# EAGLE board drs (EAGLE 7.6.0)
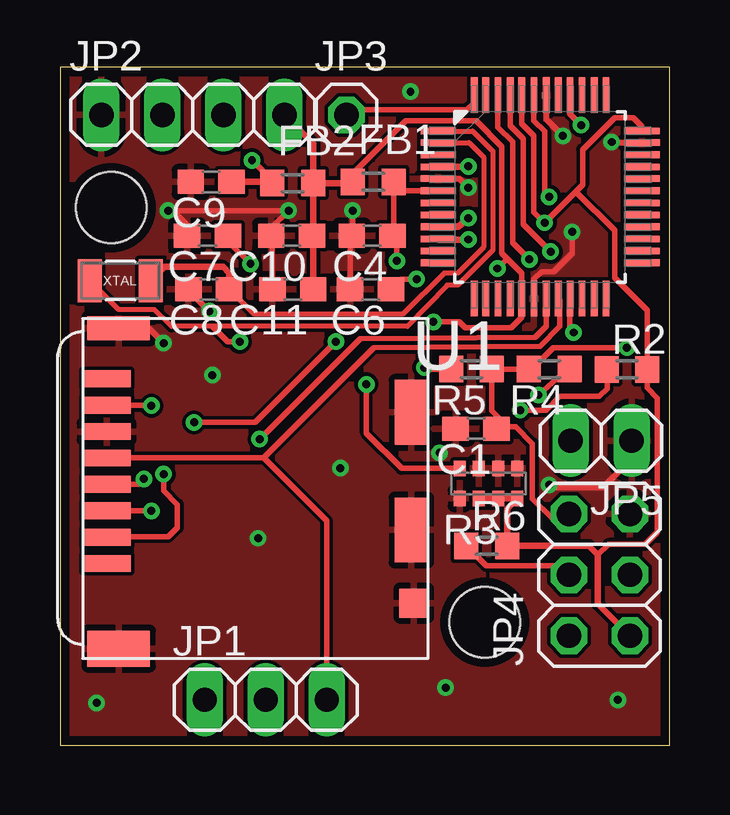
[diagram p0: board, top side]
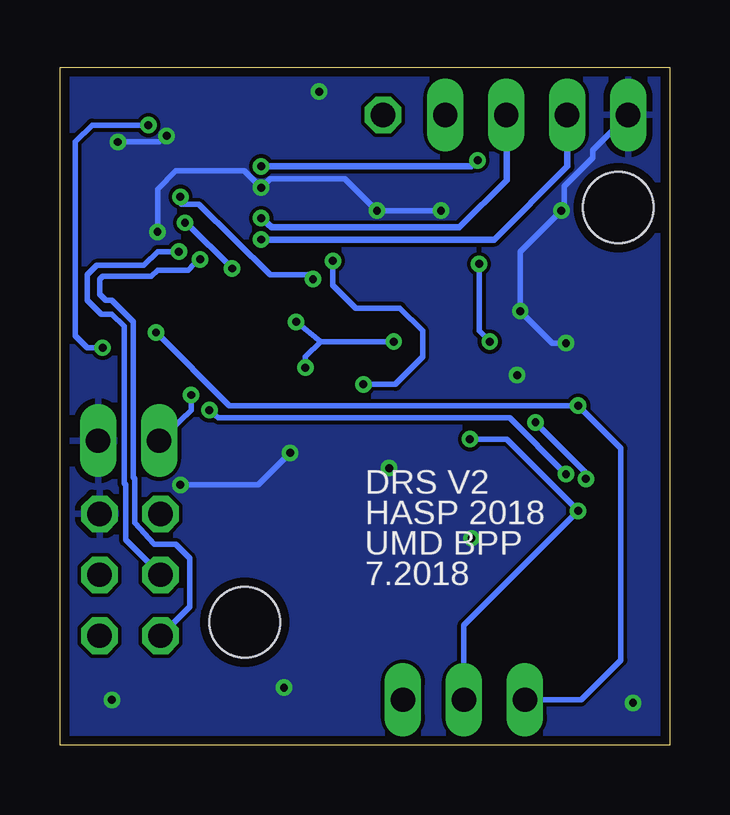
[diagram p1: board, bottom side, seen from below]

Size 25.4 x 28.26 mm. Coordinates in mm from the lower left corner, seen from the top.
Outline: 0,0 25.4,0 25.4,28.26 0,28.26 0,0
Copper layers (1*16): Top 0.0356mm / dielectric 1.5011mm / Bottom 0.0356mm
Design rules "OshPark": minimum track width 6mil, minimum drill 13mil, track to track 6mil, track to pad 6mil, pad to pad 6mil, via to via 6mil, smd to smd 6mil, copper to edge 15mil, drill to drill 6mil, minimum pad ring 7mil, minimum via ring 7mil, stop-mask expansion 3mil, vias tented up to drill 0mil, thermal gap 10mil
Holes 2.95 mm at 2.13,22.42 17.7,5.13

## Footprints (pad centres in the part's own frame; a part is rotated, then mirrored left to right if it is on the bottom)
C0603 = smd 1.1 x 1: 1 -0.85,0; 2 0.85,0
0603 = smd 1 x 1.1: 1 -0.85,0; 2 0.85,0
1X03 = drill 1.016 long: 1 -2.54,0; 2 0,0; 3 2.54,0
1X04 = drill 1.016 long: 1 -3.81,0; 2 -1.27,0; 3 1.27,0; 4 3.81,0
1X01 = drill 1.016 octagon: 1 0,0
2X03 = drill 1.016 octagon: 1 -2.54,-1.27; 2 -2.54,1.27; 3 0,-1.27; 4 0,1.27; 5 2.54,-1.27; 6 2.54,1.27
1X02 = drill 1.016 long: 1 -1.27,0; 2 1.27,0
R0603 = smd 1 x 1.1: 1 -0.85,0; 2 0.85,0
0603-ARV = smd 0.5 x 0.65: 1 -1.2,-0.625; 2 -0.4,-0.625; 3 0.4,-0.625; 4 1.2,-0.625; 5 1.2,0.625; 6 0.4,0.625; 7 -0.4,0.625; 8 -1.2,0.625
48-TQFP = smd 1.473 x 0.279: 1 -4.242,2.743; 2 -4.242,2.261; 3 -4.242,1.753; 4 -4.242,1.245; 5 -4.242,0.762; 6 -4.242,0.254; 7 -4.242,-0.254; 8 -4.242,-0.762; 9 -4.242,-1.245; 10 -4.242,-1.753; 11 -4.242,-2.261; 12 -4.242,-2.743; 25 4.242,-2.743; 26 4.242,-2.261; 27 4.242,-1.753; 28 4.242,-1.245; 29 4.242,-0.762; 30 4.242,-0.254; 31 4.242,0.254; 32 4.242,0.762; 33 4.242,1.245; 34 4.242,1.753; 35 4.242,2.261; 36 4.242,2.743 | smd 0.279 x 1.473: 13 -2.743,-4.242; 14 -2.261,-4.242; 15 -1.753,-4.242; 16 -1.245,-4.242; 17 -0.762,-4.242; 18 -0.254,-4.242; 19 0.254,-4.242; 20 0.762,-4.242; 21 1.245,-4.242; 22 1.753,-4.242; 23 2.261,-4.242; 24 2.743,-4.242; 37 2.743,4.242; 38 2.261,4.242; 39 1.753,4.242; 40 1.245,4.242; 41 0.762,4.242; 42 0.254,4.242; 43 -0.254,4.242; 44 -0.762,4.242; 45 -1.245,4.242; 46 -1.753,4.242; 47 -2.261,4.242; 48 -2.743,4.242
MICRO_SD_HINGED = smd 0.7 x 2: CD -1.1,-13.4; CLK -4.4,-13.4; CMD -2.2,-13.4; DAT0 -6.6,-13.4; DAT1 -7.7,-13.4; DAT2 0,-13.4; VDD -3.3,-13.4; VSS -5.5,-13.4 | smd 2.7 x 1.4: CD1 -1.4,-0.7; GND3 -6.3,-0.7 | smd 1.5 x 2.6: GND1 3.55,-12.9 | smd 1.2 x 1.2: GND2 1.65,-0.6 | smd 1 x 2.6: GND4 -9.8,-12.9
2-SMD = smd 1 x 1.8: P1 -1.275,0; P2 1.275,0

## Placement (x,y rotation side)
C1  100nF  [C0603]  17.34,13.21 180 top
C4  10uF  [C0603]  13,21.25 180 top
C6  1uF  [C0603]  12.94,19.01 180 top
C7  6.8pF  [C0603]  6.15,21.25 180 top
C8  6.8pF  [C0603]  6.2,19.01 180 top
C9  100nF  [C0603]  6.3,23.48 180 top
C10  6.8pF  [C0603]  9.65,21.25 180 top
C11  6.8pF  [C0603]  9.7,19.01 180 top
FB1  [0603]  13.06,23.48 0 top
FB2  [0603]  9.7,23.43 0 top
JP1  [1X03]  8.57,1.9 0 top
JP2  [1X04]  5.54,26.28 0 top
JP3  [1X01]  11.94,26.28 0 top
JP4  [2X03]  22.48,7.11 90 top
JP5  [1X02]  22.54,12.7 180 top
R2  1M  [R0603]  23.62,15.67 0 top
R3  100nF  [0603-ARV]  17.86,10.92 0 top
R4  330  [R0603]  20.38,15.68 180 top
R5  10k  [R0603]  17.14,15.68 180 top
R6  10k  [R0603]  17.78,8.32 0 top
U1  ATSAMD21G18  [48-TQFP]  20,22.86 0 top
U$1  MICRO_SD  [MICRO_SD_HINGED]  15.34,7.58 270 top
XTAL1  [2-SMD]  2.51,19.37 180 top

## Library data of the parts
C1 C4 C6-C11 R2 R4-R6 = resistor
FB1 FB2 = AR_passives
JP1-JP5 = pinhead
R3 = SparkFun-Passives
U1 = AR_mcu
U$1 = NR_connectors
XTAL1 = AR_XTAL

## Nets
+3V3: C10.1 C11.1 FB1.1 FB2.2 JP2.4 JP4.1 R2.2 R3.2 R3.3 R3.4 R5.2 R6.2 U1.17 U1.36 U1.44 U$1.VDD
AIN1: JP2.3 U1.9
AIN2: JP2.2 U1.10
GND: C1.2 C4.2 C6.2 C7.2 C8.2 C9.2 C10.2 C11.2 JP2.1 JP4.5 JP5.1 R3.1 R3.5 R3.6 R3.7 U1.5 U1.18 U1.35 U1.42 U$1.CD1 U$1.GND1 U$1.GND2 U$1.GND3 U$1.GND4 U$1.VSS
LED: JP3.1 U1.48
MISO: JP1.1 U1.21 U$1.DAT0
MOSI: JP1.2 U1.19 U$1.CMD
N$1: R2.1 U$1.CD
N$4: C6.1 U1.43
N$5: C4.1 FB1.2 R3.8 U1.6
N$6: JP4.3
N$12: JP5.2 R4.1
RESET: C1.1 JP4.6 R4.2 R5.1 U1.40
SCK: JP1.3 U1.20 U$1.CLK
SWDCLK: JP4.4 R6.1 U1.45
SWDIO: JP4.2 U1.46
VREFA: C9.1 FB2.1 U1.4
XIN32: C7.1 U1.1 XTAL1.P2
XOUT32: C8.1 U1.2 XTAL1.P1

## Tracks (layer width: path | path; a pad name or v marks a point on that pad's centre or on a via)
+3V3  (via drill 0.33)
  Top 0.229: 12.21,23.83 14.41,26.03 17.34,26.03 18.41,24.96 18.41,20.51 18.64,20.29 | 18.64,20.29 19.24,19.69 U1.17 19.24,17.84 18.8,17.4 16.89,17.4 16.64,17.65 v15.56,17.65 | U1.44 19.24,25.91 19.75,25.4 19.75,22.22 v20.19,21.78 21.5,23.08 | v18.22,19.88 18.64,20.29 | R2.2 24.47,18.14 23.11,19.49 23.11,21.46 21.5,23.08 | U$1.VDD 3.26,10.88 v3.49,11.11 | v5.59,13.46 8.13,13.46 v11.49,16.83 | R5.2 15.24,15.68 v15.18,15.75 | R2.2 24.37,15.67 | R2.2 24.47,14.9 24.89,14.48 24.89,8.89 24.38,8.38 22.86,8.38 22.42,7.94 | U1.36 24.24,25.79 23.88,26.16 23.11,26.16 21.78,24.83 21.78,23.37 21.5,23.08
  Top 0.279: FB2.2 12.15,23.43 FB1.1 12.21,23.83 | FB2.2 10.55,21.3 C10.1 10.55,21.2 C11.1 | JP4.1 22.42,5.91 22.42,7.94 22.04,8.32 R6.2 18.63,9.87 R3.4 R3.3 R3.2 | JP2.4 10.55,25.07 FB2.2
  Bottom 0.229: v20.19,21.78 20.13,21.78 v18.22,19.88 | v3.49,11.11 3.49,11.37 v5.59,13.46 | v11.49,16.83 14.54,16.83 | 14.54,16.83 v15.56,17.65 | v15.18,15.75 15.18,16.19 14.54,16.83
AIN1  (via drill 0.33)
  Top 0.279: U1.9 16.6,21.62 v17.02,21.97
  Bottom 0.279: v17.02,21.97 16.57,21.59 8.76,21.59 6.79,23.56 6.79,26.26 JP2.3
AIN2  (via drill 0.33)
  Top 0.279: U1.10 15.79,21.08 v17.02,21.08
  Bottom 0.279: v17.02,21.08 7.3,21.08 4.25,24.13 4.25,26.26 JP2.2
GND  (via drill 0.33)
  Top 0.229: v12.19,22.29 12.19,21.28 C4.2 12.09,21.18 C6.2 | v17.02,23.24 16.64,23.62 U1.5 | C11.2 8.85,21.2 | 8.85,21.2 C10.2 | 5.3,23.33 C9.2 | 5.35,21.64 4.7,22.29 v4.51,22.29 v9.53,22.29 8.85,21.62 8.85,21.2 | C8.2 5.35,18.97 v6.22,18.1 | U$1.GND4 3.7,17.38 v4.32,16.76 | U1.18 19.75,19.43 20.07,19.75 20.57,19.75 21.34,20.51 v21.34,21.4 | 23.81,9.72 JP4.5 | JP5.1 23.81,11.94 22.61,10.73 20.51,10.73 v20.38,10.86 | U1.42 20.26,26.1 v20.95,25.4 | U1.35 23.14,25.12 v22.99,25.15
  Bottom 0.229: JP2.1 3.2,24.8 3.2,24.49 4.38,23.3 4.38,22.42 v4.51,22.29 6.22,20.57 v6.22,18.1 4.89,16.76 v4.32,16.76 | v9.53,22.29 v12.19,22.29 13.53,23.62 16.64,23.62 v17.02,23.24 17.72,23.94 20.57,23.94 21.34,23.18 v21.34,21.4 | v20.38,10.86 17.14,10.86 v15.81,12.19 | v22.99,25.15 21.27,25.15 v20.95,25.4
  other vias: 1.52,1.78 8.26,8.64 16.07,2.41 11.68,11.56 6.35,15.43 14.61,27.24 23.24,1.9
  pour Top: -3.81,29.53 27.94,29.53 27.94,-2.22 -3.81,-2.22
  pour Bottom: -2.54,28.26 -2.54,-1.91 28.57,-1.91 28.57,28.26
LED
  Top 0.229: JP3.1 12.14,26.48 16.95,26.48 17.26,26.78 U1.48
MISO  (via drill 0.33)
  Top 0.229: v21.4,17.21 21.25,17.36 U1.21 | U$1.DAT0 3.79,14.18 v3.81,14.16
  Top 0.279: 21.27,18.59 U1.21
  Bottom 0.229: v21.4,17.21 18.35,14.16 v3.81,14.16 2.03,12.38 2.03,3.56 3.68,1.9 JP1.1
MOSI  (via drill 0.33)
  Top 0.229: U1.19 20.26,17.46 19.81,17.02 12.51,16.95 v8.32,12.76 | v3.81,9.78 U$1.CMD
  Bottom 0.229: v8.32,12.76 6.79,12.76 v3.81,9.78 8.57,5.02 JP1.2
N$1  (via drill 0.33)
  Top 0.229: 22.77,15.47 R2.1 22.8,15.65 22.8,14.86 22.48,14.54 20.83,14.54 20.26,13.97 v19.18,13.97 | v4.32,11.3 4.32,10.6 4.89,10.03 4.89,9.08 4.51,8.7 1.96,8.7 U$1.CD
  Bottom 0.229: v4.32,11.3 6.67,13.65 18.8,13.65 v19.18,13.97
N$4  (via drill 0.33)
  Top 0.229: U1.43 19.75,26.03 20.19,25.59 20.19,23.05 v20.38,22.86 | v14.86,19.43 14.21,19.43 C6.1
  Bottom 0.229: v20.38,22.86 20.38,22.61 20.32,22.54 19.62,22.54 16.64,19.62 15.05,19.62 v14.86,19.43
N$5  (via drill 0.33)
  Top 0.229: 14.27,23.11 U1.6 | 13.91,21.3 FB1.2 | R3.8 14.23,11.55 12.76,13.02 v12.76,15.05 | v14.03,20.19 14.03,21.07 C4.1
  Top 0.279: FB1.2 14.27,23.11 | C4.1 13.91,21.3
  Bottom 0.229: v14.03,20.19 14.03,19.18 13.08,18.22 11.24,18.22 10.29,17.27 10.29,16.19 11.43,15.05 v12.76,15.05
N$12  (via drill 0.33)
  Top 0.229: R4.1 21.08,15.68 21.08,15.62 v19.94,14.61
  Bottom 0.229: v19.94,14.61 19.94,13.97 JP5.2
RESET  (via drill 0.33)
  Top 0.229: U1.40 21.25,26.31 v21.72,25.84 | v23.62,16.57 20.55,16.57 19.66,15.68 R4.2 R5.1 18,13.95 18.67,13.27 18.99,13.27 19.68,12.57 19.68,10.29 20.51,9.46 21.02,9.46 JP4.6
  Top 0.279: 18.67,13.27 18.25,13.27 C1.1
  Bottom 0.229: v23.62,16.57 24.26,16.57 24.77,17.08 24.77,25.15 24.07,25.84 v21.72,25.84
SCK
  Top 0.229: U$1.CLK 8.49,11.98 | 8.49,11.98 13.08,16.57 20,16.64 20.83,17.46 20.83,18.55 U1.20 | JP1.3 11.11,9.36 8.49,11.98
SWDCLK  (via drill 0.33)
  Top 0.229: R6.1 17.76,7.49 20.83,7.49 JP4.4 | U1.45 18.76,25.82 19.3,25.27 19.3,21.72 v20.45,20.57
  Bottom 0.229: v20.45,20.57 21.34,20.57 21.91,20 23.88,20 24.26,19.62 24.26,18.54 23.69,17.97 23.24,17.97 22.73,17.46 22.73,10.92 22.67,10.86 22.67,8.57 JP4.4
SWDIO  (via drill 0.33)
  Top 0.229: U1.46 18.25,25.76 18.86,25.15 18.86,20.96 v19.56,20.26
  Bottom 0.229: v19.56,20.26 19.81,20.07 20.07,19.81 21.34,19.81 21.59,19.56 23.62,19.56 23.75,19.43 23.75,18.8 23.5,18.54 23.24,18.54 22.35,17.65 22.35,11.18 22.29,11.11 22.29,9.27 21.46,8.38 20.57,8.38 20,7.81 20,5.78 JP4.2
VREFA  (via drill 0.33)
  Top 0.279: C9.1 8.8,23.48 FB2.1 8.85,23.53 v8,24.38 | U1.4 16.93,24.1 v17.02,24.13
  Bottom 0.279: v17.02,24.13 8.26,24.13 v8,24.38
XIN32  (via drill 0.33)
  Top 0.203: U1.1 17.2,25.6 18.03,24.76 18.03,20.64 16.57,19.18 16.13,19.18 14.48,17.46 6.35,17.46 4.64,17.46 3.94,18.16 2.45,18.16 XTAL1.P2
  Top 0.229: C7.1 7,21.01 v7.94,20.07 | v7.49,16.83 6.99,16.83 6.35,17.46
  Bottom 0.229: v7.94,20.07 7.94,17.27 v7.49,16.83
XOUT32
  Top 0.203: U1.2 17.04,25.12 17.65,24.51 17.65,20.76 16.57,19.69 16,19.69 14.29,17.97 8.09,17.97 C8.1
  Top 0.279: C8.1 7.05,19.69 6.79,19.94 4.36,19.94 XTAL1.P1

## Text on the board
bPlace: DRS V2 | HASP 2018 | UMD BPP | 7.2018